# Altium PCB JWB-001_Charger.PcbDoc
Units mil, origin at the board's own origin, x right, y up, seen from the top; angles counter-clockwise.
Board outline 685.53 x 541.65 mil, 2 copper layers (Top, Bottom), stack 30.2 mil thick; 12 components, 10 nets, 53 pads, 38 vias.
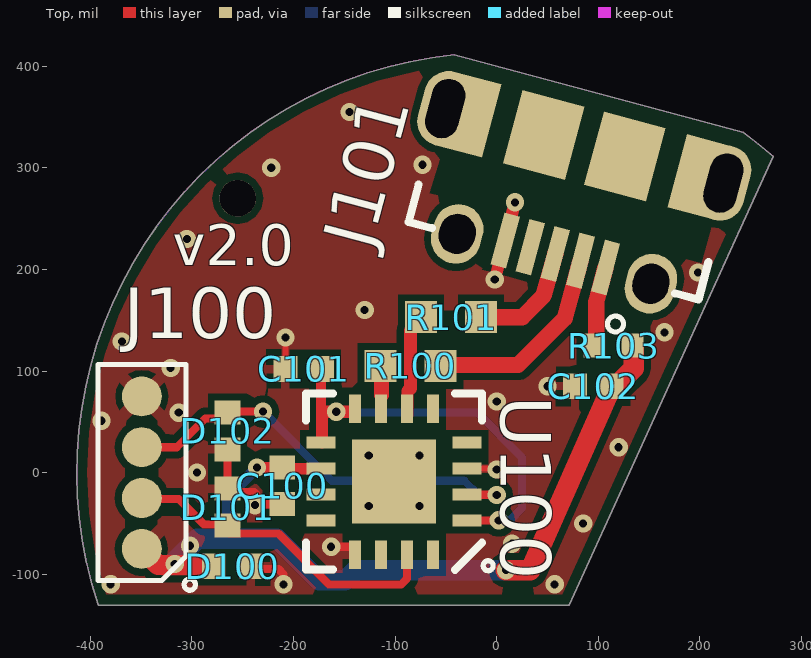
[diagram p0: Top view]
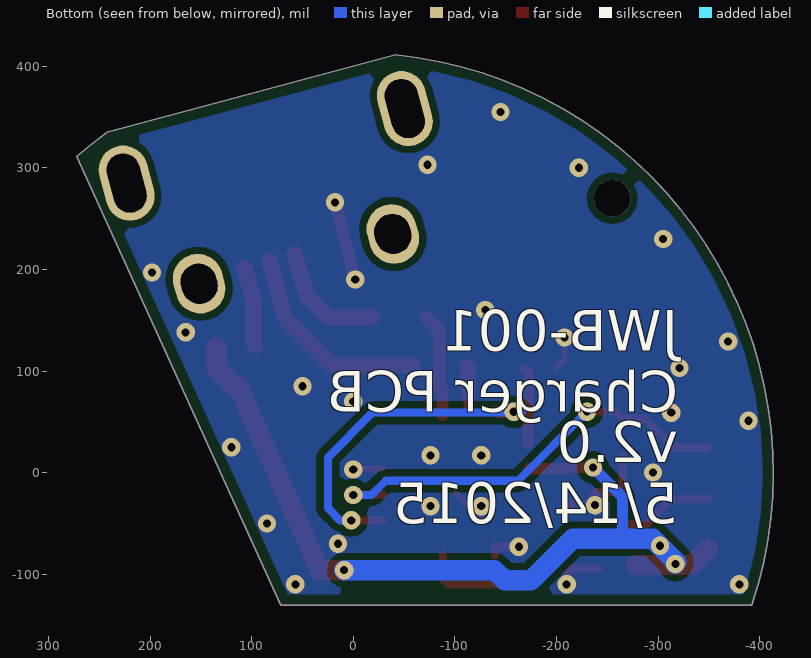
[diagram p1: Bottom view, seen from below]

## Layer stack, top to bottom
Top Solder: solder mask 0.8, Solder Resist, Dk 3.5
Top: signal copper 1.6
Core 1: core 27, Composite dielectric, Dk 4.2
Bottom: signal copper 1.6
Bottom Solder: solder mask 0.8, Solder Resist, Dk 3.5

## Board outline
-392.28,-130.4 71.49,-130.4 272.15,311.17 ccw(c0,0) 242.39,334.87 -41.92,411.25 ccw(c0,0)

## Design rules (kind name [scope] priority, off if disabled: settings)
Clearance Clearance_Poly [InPolygon vs (OnLayer('Keep-Out Layer'))] p1: gap=6 except(0: Arc-Text Track-Text SMDPad-Text THPad-Text Via-Text Fill-Text Poly-Text Region-Text Text-Text; 10: Arc-Poly Arc-Region Track-Poly Track-Region SMDPad-Poly SMDPad-Region THPad-Poly THPad-Region Via-Poly Via-Region Fill-Poly Fill-Region Poly-Poly Poly-Region Region-Region)
Clearance [All] p2: gap=7 except(0: Arc-Text Track-Text SMDPad-Text THPad-Text Via-Text Fill-Text Poly-Text Region-Text Text-Text)
ComponentClearance [All] p1: gap=5 collisioncheckmode=3 verticalgap=10 showdistances=FALSE
Height [All] p1: minheight=0 maxheight=1000 prefheight=100
HoleSize [All] p1: absolutevalues=TRUE maxlimit=100000 minlimit=5 maxpercent=80.000 minpercent=20.000
HoleToHoleClearance [All] p1: gap=6 allowstackedmicrovias=TRUE
MinimumSolderMaskSliver [All] p1: minsoldermaskwidth=1
PlaneClearance [InPoly] p1: clearance=10
PlaneConnect [All] p1 off: planeconnectstyle=Relief reliefexpansion=20 reliefentries=4 reliefconductorwidth=10 reliefairgap=10
PolygonConnect ThermalVias [IsVia] p1: connectstyle=Direct reliefconductorwidth=10 reliefentries=4 polygonreliefangle="90 Angle" airgapwidth=10
PolygonConnect "PolygonConnect - Power" [InComponent('J100')] p2: connectstyle=Relief reliefconductorwidth=12 reliefentries=4 polygonreliefangle="45 Angle" airgapwidth=6
PolygonConnect PolygonConnect-BGA [InComponentClass('')] p3: connectstyle=Relief reliefconductorwidth=6 reliefentries=4 polygonreliefangle="45 Angle" airgapwidth=6
PolygonConnect PolygonConnect-General [All] p4: connectstyle=Relief reliefconductorwidth=8 reliefentries=4 polygonreliefangle="90 Angle" airgapwidth=7
RoutingVias [All] p1: holewidth=8 width=18 viastyle="Through Hole" minholewidth=8 minwidth=18 maxholewidth=8 maxwidth=18
SilkToBoardRegionClearance [All] p1 off:
SilkToSilkClearance [All] p1 off: silktosilkclearance=1
SilkToSolderMaskClearance [IsPad] p1 off: minsilkscreentomaskgap=0 clearancetoexposedcopper=TRUE
SolderMaskExpansion SolderMaskExpansion_via [IsVia] p1: expansion=-10
SolderMaskExpansion [All] p2: expansion=3.5
ViasUnderSMD ViasUnderSMD_Pad [InNet('GND')] p1: allowed=TRUE
ViasUnderSMD [All] p2: allowed=FALSE
Width [All] p1: maxlimit=100 minlimit=6 preferedwidth=6
20 further rules are at their usual default settings.

## Components (designator, comment, footprint, x,y, rotation, side; value= is the part's Value field where it differs from the comment)
C100 "Cap 0402 4.7uF 10V4.7uF" "Cap 0402 HD" -211,-13 r270 top
C101 "Cap 0402 0.1uF 10V0.1uF" "Cap 0402 HD" -190,102 r180 top
C102 "Cap 0402 1.0uF 10V1.0uF" "Cap 0402 HD" 95,85 r180 top
D100 "SESD0402P1BN-0450-0906V" "CAP 0402 HD" -260,-92 r0 top
D101 "SESD0402P1BN-0450-0906V" "CAP 0402 HD" -265,-34 r270 top
D102 "SESD0402P1BN-0450-0906V" "CAP 0402 HD" -265,41 r270 top
J100 "854-22-004-30-001101" HDR.050P-4Pin-SMT-R -349.33,0 r90 top
J101 "USB_Micro_B_W-Tabs" USB_Micro_RA_W-TABS 86.19,321.65 r165 top
R100 "Res 0603 27R 5%27" "RES 0603 HD" -85,105 r180 top
R101 "Res 0603 27R 5%27" "RES 0603 HD" -45,153 r180 top
R103 "Res 0402 0R Jumper0" "RES 0402" 115,125 r0 top
U100 "FT230XQ" QFN0.65P4x4-16Pin_W-Pad -101,-9 r180 top

## Footprints (in the part's own frame and the unit in brackets; to place one, negate y for a bottom-side part, rotate by r counter-clockwise, add the part's x,y. Pads: shape width x height; smd on the part's side, far side on the other; paste and mask are expansions set on the pad)
"Cap 0402 HD" [mm] "Chip Capacitor, 2-Leads, Body 1.00x0.50mm, IPC Medium Density"
  rect 0.6x0.64 smd: 1(-0.46,0) 2(0.46,0)
  body extent -0.55,-0.3 0.55,0.3, height 0.6
"CAP 0402 HD" [mm] "Chip Capacitor, 2-Leads, Body 1.00x0.50mm, IPC Medium Density"
  rect 0.6x0.64 smd: 1(-0.46,0) 2(0.46,0)
  body extent -0.55,-0.3 0.55,0.3, height 0.6
HDR.050P-4Pin-SMT-R [mm] "Header 0.050\" Pitch, 4Pin 1 row, SMT with 1mm Round pads"
  round 1 smd mask+0.08: 1(-1.905,0) 2(-0.635,0) 3(0.635,0) 4(1.905,0)
  silkscreen extent -2.94,-1.34 2.7,1.1, body extent -2.74,-1.11 2.74,1.11, height 6.4
QFN0.65P4x4-16Pin_W-Pad [mm] "QFN, 16-Leads, Body 4x4mm, Pitch 0.65mm, Thermal Pad 2.1x2.1mm, IPC High Density"
  rect 0.72x0.3 smd: 1(-1.825,0.975) 2(-1.825,0.325) 3(-1.825,-0.325) 4(-1.825,-0.975) 9(1.825,-0.975) 10(1.825,-0.325) 11(1.825,0.325) 12(1.825,0.975)
  rect 0.3x0.72 smd: 5(-0.975,-1.825) 6(-0.325,-1.825) 7(0.325,-1.825) 8(0.975,-1.825) 13(0.975,1.825) 14(0.325,1.825) 15(-0.325,1.825) 16(-0.975,1.825)
  rect 2.1x2.1 smd paste-1.05: 17(0,0)
  silkscreen extent -2.48,-2.2 2.2,2.22, body extent -2.05,-2.05 2.05,2.05, height 0.8
"RES 0402" [mm] "Chip Resistor, 2-Leads, Body 1.05x0.54mm, IPC Medium Density"
  rect 0.55x0.6 smd: 1(-0.475,0) 2(0.475,0)
  body extent -0.55,-0.3 0.55,0.3, height 0.4
"RES 0603 HD" [mm] "Chip Resistor, 2-Leads, Body 1.60x0.82mm, IPC High Density"
  rect 0.8x0.8 smd: 1(-0.75,0) 2(0.75,0)
  body extent -0.85,-0.48 0.85,0.48, height 0.55
USB_Micro_RA_W-TABS [mm] "USB Micro-AB Connector, 5-Leads, Pitch 0.65mm, 8mm x 5mm"
  rect 0.4x1.35 smd: 1(-1.3,2.8) 2(-0.65,2.8) 3(0,2.8) 4(0.65,2.8) 5(1.3,2.801)
  oval 1.225x1.9 hole 0.825 slot 1.5 at 90 deg: 6(-3.6,0) 6(3.6,0.001)
  rect 1.2x1.9 smd: 6(-3,0) 6(3,0)
  oval 1.25x1.5 hole 0.9 slot 1 at 90 deg: 6(-2.5,2.9) 6(2.5,2.95)
  rect 1.6x1.9 smd: 6(-1.05,0) 6(1.05,0)
  silkscreen extent -3.75,2 3.75,4.3, body extent -4,-2.62 4,3.43, height 2.83

## Part data
C100: library part "Cap 0402 4.7uF 10V", "Cap, Ceramic 4.7uF 10V 20% X5R 0402"
C101: library part "Cap 0402 0.1uF 10V", "Cap, Ceramic 0.1uF 10V 10% X5R 0402"
C102: library part "Cap 0402 1.0uF 10V", "Cap, Ceramic 1.0uF 10V 10% X5R 0402"
D100 D101 D102: library part SESD0402P1BN-0450-090, "ESD TVS Diode, 16kV air, 0402"
J100: "Spring Loaded Header 0.05\" Pitch, 4Pin, 4x1, 4.98mm - 6.4mm Height"
J101: "USB Micro B Receptacle, Right Angle, SMT with 4 TH Tabs"
R100 R101: library part "Res 0603 27R 5%", "Resistor 27 ohm 5%, 1/10W, 0603"
R103: library part "Res 0402 0R Jumper", "Resistor 0 ohm 1/16W 0402"
U100: "USB to UART converter IC, Single channel with flow control, QFN-16"

## Free pads (board coordinates)
  round 35.98 hole 35.98: 0(-255,270)

## Via types
v1: diameter 18, hole 8, Top to Bottom, 38 vias

## Nets (pads, with @x,y where several pads share a name; then routed paths per layer and width w, separated by ;. In a path a pad name is that pad's centre, name@x,y a point inside that pad or via, vN(x,y) a via of type N, cw(c..) or ccw(c..) an arc to the next point about the centre after c; other vN are vias at no path point)
3V3: C101.1 U100.1 U100.8 U100.9 | length 428.7
  Top w8: U100.1 -28.76,-47 v1(2,-47)
  Top w10: -172,52 -173,53 -173,97.89 C101.1@-168.89,102
  Top w12: U100.9@-172,29.87 -172,52 -172,58.89 ; -170.89,59.89 v1(-158,59.89) U100.8@-141.98,59.89
  Bottom w8: v1@-166.11,59.89 v1(-158,59.89) ; v1@-158,59 -19,59 25,15 25,-35 13,-47 v1(2,-47)
GND: C100.2 C101.2 C102.2 D100.2 D101.1 D102.2 J100.4 J101.5 U100.3 U100.13 U100.17 | length 355.9
  Top w6: v1@-236,-31 v1@-235.89,-31.11 ; v1(-208,133) -208,110.98 C101.2@-200,102.98 ; U100.17@-125,-45 -125,-44.37 U100.17@-100.59,-19.96 ; U100.3@-28.74,4 -1,4 v1(0,3)
  Top w8: D102.2@-265,16.89 D101.1 -265,-21.89 -262.11,-19 -239,-19 -236,-22 v1@-236,-31 ; D100.2@-241.89,-95 -215,-95 -210,-100 v1(-210,-110) ; v1@-235.89,-31.11 C100.2 ; v1(-163,-73) -139.39,-73 U100.13
  Top w12: v1(-2,190) J101.5 v1(18,266)
  other v1: -380,-110 57,-110 15,-70 85,-50 -126,-33 -76,-33 -238,-32 -295,0 -126,17 -76,17 120,25 -389,51 -313,59 0,70 50,85 -321,103 -369,129 165,138 -130,160 198,197 -305,230 -222,300 -73,303 -145,355
NetD101_2: D101.2 J100.2 U100.15 | length 322.1
  Top w8: J100.2 -348.33,-26 -313,-26 -288,-51 -272.11,-51 -263.11,-60 -215,-60 -165,-110 -94,-110 -88.2,-104.2 U100.15
NetD102_1: D102.1 J100.3 U100.2 | length 427
  Top w8: J100.3 -315,25 -286.89,53.11 -265,53.11 -258.11,60 v1(-230,60) ; U100.2 -0.2,-21.8 v1(0,-22)
  Bottom w8: v1(-230,60) -162,-8 -32,-8 -18,-22 v1(0,-22)
NetJ101_1: J101.1 R103.1 | length 78.8
  Top w16: R103.1 98,126.7 98,168 J101.1
NetJ101_2: J101.2 R100.1 | length 208.2
  Top w16: R100.1@-58.43,100.91 -58.43,106 21,106 67,152 J101.2
NetJ101_3: J101.3 R101.1 | length 115.9
  Top w16: R101.1@-18.43,153 R101.1 25,153 46,174 J101.3
NetR100_2: R100.2 U100.7 | length 42.9
  Top w10: U100.7@-113.39,62.85 U100.7@-113.39,76.39
  Top w15: U100.7@-113.39,76.39 -113.39,103.19 R100.2@-111.57,105
NetR101_2: R101.2 U100.6 | length 102.7
  Top w12: U100.6@-87.8,57 -87.8,80.2 -85,83
  Top w13: -85,83 -85,139.57 R101.2@-71.57,153
VUSB: C100.1 C102.1 D100.1 J100.1 R103.2 U100.10 | length 855.8
  Top w11: v1(-236,5) -235.89,5.11 C100.1 -209.69,3.8 U100.10
  Top w20: J100.1 -333.33,-91 D100.1@-278.11,-91 ; v1(9,-96) 33,-96 C102.1 117,85 134.7,102.7 R103.2@134.7,124
  Bottom w11: -265,-65 -265,-24 v1(-236,5)
  Bottom w20: v1(-317,-90) -317,-89 -318,-88 -295,-65 -265,-65 -216,-65 -175,-106 -149,-106 -139,-96 v1(9,-96)
  other v1: -302,-72
pads on no net: J101.4 J101.6 U100.4 U100.5 U100.11 U100.12 U100.14 U100.16
copper on no net: | length 4060
  Top w7.87: 7472.1,143.87 7472.1,238.87 8392.1,238.87 8392.1,143.87 7472.1,143.87
  Bottom w7.87: 7472.1,-211.13 7472.1,-116.13 8392.1,-116.13 8392.1,-211.13 7472.1,-211.13

## Polygon pours and split planes (outlines as drawn)
GND on Top "Top-GND" (solid, remove dead copper, pour order 6): -392.28,-130.4 71.49,-130.4 272.15,311.17 ccw(c0,0) 242.39,334.87 -41.92,411.25 ccw(c0,0)
VUSB on Top "Top-VUSB" (solid, pour order 4): -364,-49 -364,-86 -356,-94 -349,-101 -276,-101 -276,-72 -304,-44 -305,-43 -364,-43 -364,-52
GND on Bottom "Bottom-GND" (solid, remove dead copper, pour order 8): -392.28,-130.4 71.49,-130.4 272.15,311.17 ccw(c0,0) 242.39,334.87 -41.92,411.25 ccw(c0,0)

## Keep-outs
Keep-Out Layer:
  rectangle: 7472.1,-927.13 7662.1,-832.13
  lines w1: -392.28,-130.4 cw(c0,0) -41.92,411.25 242.39,334.87 cw(c0,0) 272.15,311.17 71.49,-130.4 -392.28,-130.4
  lines w7.87: 7472.1,-927.13 7472.1,-832.13 8392.1,-832.13 8392.1,-927.13 7472.1,-927.13
  text "ROUTING KEEPOUT LAYER" at 7732.1,-900.13 h35

## Other copper
Top:
  rectangle: 7472.1,143.87 7662.1,238.87
  pour cut-out: -56,160 -62,154 -62,142 -62,99 17,99 55,137 55,160
  pour cut-out: -27,405 -66.5,275 202,206 237,335
  text ".Layer_Name" at 7732.1,170.87 h40
Bottom:
  rectangle: 7472.1,-211.13 7662.1,-116.13
  text ".Layer_Name" at 7732.1,-184.13 h40
Multi-Layer:
  rectangle: 7462.1,-1047.13 7652.1,-952.13
  lines w7.87: 7462.1,-1047.13 7462.1,-952.13 8382.1,-952.13 8382.1,-1047.13 7462.1,-1047.13
  text "MULTILAYER" at 7722.1,-1020.13 h40

## Silkscreen, mask and mechanical layers (free items; w line width, h text height)
Top Overlay:
  rectangle: 7472.1,379.87 7662.1,474.87
  lines w7.87: 7472.1,379.87 8392.1,379.87 8392.1,474.87 7472.1,474.87 7472.1,379.87
  text ".Layer_Name" at 7732.1,406.87 h31.5
  text "v2.0" at -319,204 h40
Bottom Overlay:
  rectangle: 7472.1,-447.13 7662.1,-352.13
  lines w7.87: 7472.1,-447.13 8392.1,-447.13 8392.1,-352.13 7472.1,-352.13 7472.1,-447.13
  text "JWB-001" at -320,120 h40
  text "Charger PCB" at -320,60 h40
  text "v2.0" at -320,10 h40
  text "5/14/2015" at -320,-50 h40
  text ".Layer_Name" at 7732.1,-420.13 h40
Top Paste:
  rectangle: 7472.1,497.87 7662.1,592.87
  lines w7.87: 7472.1,497.87 7472.1,592.87 8392.1,592.87 8392.1,497.87 7472.1,497.87
  text ".Layer_Name" at 7732.1,524.87 h40
Bottom Paste:
  rectangle: 7472.1,-565.13 7662.1,-470.13
  lines w7.87: 7472.1,-565.13 7472.1,-470.13 8392.1,-470.13 8392.1,-565.13 7472.1,-565.13
  text ".Layer_Name" at 7732.1,-538.13 h40
Top Solder:
  rectangle: 7472.1,261.87 7662.1,356.87
  lines w7.87: 7472.1,261.87 8392.1,261.87 8392.1,356.87 7472.1,356.87 7472.1,261.87
  text ".Layer_Name" at 7732.1,288.87 h40
Bottom Solder:
  rectangle: 7472.1,-329.13 7662.1,-234.13
  lines w7.87: 7472.1,-329.13 7472.1,-234.13 8392.1,-234.13 8392.1,-329.13 7472.1,-329.13
  text ".Layer_Name" at 7732.1,-302.13 h40
Drill Guide:
  rectangle: 7472.1,-683.13 7662.1,-588.13
  lines w7.87: 7472.1,-683.13 8392.1,-683.13 8392.1,-588.13 7472.1,-588.13 7472.1,-683.13
  text ".Layer_Name" at 7732.1,-656.13 h40
Board Outline:
  rectangle: 7472.1,1560.39 7662.1,1655.39
  lines w1: -392.28,-130.4 cw(c0,0) -41.92,411.25 242.39,334.87 cw(c0,0) 272.15,311.17 71.49,-130.4 -392.28,-130.4
  lines w7.87: 7472.1,1560.39 8392.1,1560.39 8392.1,1655.39 7472.1,1655.39 7472.1,1560.39
  text ".Layer_Name" at 7732.1,1587.39 h40
Border & Title:
  drawing of 1359 lines, arcs and shapes, not listed
  text "1" at -798.51,6212.76 h70
  text "2" at 1952.16,6212.76 h70
  text "3" at 4697.16,6212.76 h70
  text "4" at 7448.17,6212.76 h70
  text "REVISION" at 6700.39,5980.39 h80
  text "REV" at 5290.39,5810.39 h60
  text "DESCRIPTION" at 5720.39,5810.39 h60
  text "DATE" at 7680.39,5810.39 h60
  text "BY" at 8310.39,5810.39 h60
  text ".ReleaseRev1" at 5290.39,5660.39 h50
  text ".ReleaseDesc1" at 5720.39,5660.39 h50
  text ".ReleaseBy1" at 8260.39,5660.39 h50
  text ".ReleaseDate1" at 7600.39,5650.39 h50
  text ".ReleaseRev2" at 5290.39,5510.39 h50
  text ".ReleaseDesc2" at 5720.39,5510.39 h50
  text ".ReleaseDate2" at 7600.39,5510.39 h50
  text ".ReleaseBy2" at 8260.39,5510.39 h50
  text ".ReleaseRev3" at 5290.39,5360.39 h50
  text ".ReleaseDesc3" at 5720.39,5360.39 h50
  text ".ReleaseDate3" at 7600.39,5360.39 h50
  text ".ReleaseBy3" at 8260.39,5360.39 h50
  text "A" at -2074.84,5194.76 h70
  text "A" at 8725.16,5194.76 h70
  text "B" at -2074.84,3069.76 h70
  text "B" at 8725.16,3069.76 h70
  text "LAYER USAGE" at 7522.1,1710.87 h80
  text "C" at -2074.84,944.76 h70
  text "C" at 8725.16,944.76 h70
  text "D" at -2074.84,-1175.24 h70
  text "D" at 8725.16,-1175.24 h70
  text "PROJECT:" at 5678.16,-1303.24 h50
  text "ENGINEER:" at 4162.16,-1304.24 h50
  text ".ProjectEngineer" at 4620.39,-1369.61 h70
  text ".GlobalProjectName" at 6110.39,-1369.61 h80
  text "PCB NAME:" at 5673.16,-1517.24 h50
  text "DATE:" at 4165.16,-1521.24 h50
  text "REV:" at 7772.16,-1530.24 h50
  text ".GlobalProjectRevision" at 8057.56,-1604.84 h80
  text ".GLobalReleaseDate" at 4450.39,-1609.61 h70
  text ".PCBName" at 6110.39,-1609.61 h80
  text "For" at 3220.39,-1669.61 h70
  text "DWG NO:" at 4170.39,-1769.61 h50
  text "FILE NAME:" at 5670.39,-1769.61 h50
  text "SCALE:" at 7767.16,-1777.24 h50
  text ".GlobalClientName" at 3010.39,-1839.61 h80
  text ".Pcb_File_Name_No_Path" at 5760.39,-1879.61 h60
  text "1:1" at 8110.16,-1884.24 h50
  text ".PCBDocNum" at 4430.39,-1889.61 h60
  text "1" at -798.51,-2087.24 h70
  text "2" at 1952.16,-2087.24 h70
  text "3" at 4697.16,-2087.24 h70
  text "4" at 7448.17,-2087.24 h70
Fabrication Notes:
  drawing of 198 lines, arcs and shapes, not listed
  text "Fabrication Notes:" at -1739.8,5947.76 h70
  text "1. Fabricate to meet or exceed IPC 6011/6012 Class 2, as definied in IPC-2221" at -1792.4,5795.16 h50
  text "2. Prepreg Material: 370HR or material with TG >= 170, TD >= 340" at -1799.61,5675.39 h50
  text "3. Minimum trace width is 7mil, minimum spacing is 7mil" at -1799.61,5550.39 h50
  text "4. Board finish: Electroless Nickel, Immersion Gold (ENIG)" at -1799.61,5425.39 h50
  text "5. Flammability: Materials to meet UL94V-0 specification" at -1799.61,5325.39 h50
  text "6. Apply LPI Soldermask (Green) on both sides" at -1799.61,5200.39 h50
  text "7. Silkscreen on both sides using white epoxy ink, registration to be 10mil," at -1799.61,5075.39 h50
  text "clear silkscreen from all exposed pads" at -1649.61,4950.39 h50
  text "8. Dimensions and hole sizes are in mils" at -1799.61,4825.39 h50
  text "9. The fabricated board shall be RoHS compliant" at -1799.61,4700.39 h50
  text "2 Layer PCB 32mil +/- 10% Finished Thickness" at 3150.39,4650.39 h60
  text "All layer thickness and dielectric values are +/- 10% tolerance" at 3150.39,4550.39 h60
  text "Layer" at 3199.5,4390.5 h60
  text "Name" at 3609.41,4390.5 h60
  text "Material" at 4539.16,4390.5 h60
  text "Thickness" at 5798.79,4390.5 h60
  text "Constant" at 6448.63,4390.5 h60
  text "Board Layer Stack" at 7018.49,4390.5 h60
  text "1" at 3199.5,4270.5 h60
  text "Top Overlay" at 3609.41,4270.5 h60
  text "2" at 3199.5,4150.5 h60
  text "Top Solder" at 3609.41,4150.5 h60
  text "Solder Resist" at 4539.16,4150.5 h60
  text "0.80mil" at 5798.79,4150.5 h60
  text "3.5" at 6448.63,4150.5 h60
  text "3" at 3199.5,4030.5 h60
  text "Top" at 3609.41,4030.5 h60
  text "Copper" at 4539.16,4030.5 h60
  text "1.60mil" at 5798.79,4030.5 h60
  text "4" at 3199.5,3910.5 h60
  text "Core 1" at 3609.41,3910.5 h60
  text "Composite dielectric" at 4539.16,3910.5 h60
  text "27.00mil" at 5798.79,3910.5 h60
  text "4.2" at 6448.63,3910.5 h60
  text "5" at 3199.5,3790.5 h60
  text "Bottom" at 3609.41,3790.5 h60
  text "Copper" at 4539.16,3790.5 h60
  text "1.60mil" at 5798.79,3790.5 h60
  text "6" at 3199.5,3670.5 h60
  text "Bottom Solder" at 3609.41,3670.5 h60
  text "Solder Resist" at 4539.16,3670.5 h60
  text "0.80mil" at 5798.79,3670.5 h60
  text "3.5" at 6448.63,3670.5 h60
  text "7" at 3199.5,3550.5 h60
  text "Bottom Overlay" at 3609.41,3550.5 h60
  text ".Layer_Name" at 7732.1,1473.87 h40
Ref Des Top:
  rectangle: 7472.1,1210.87 7662.1,1305.87
  lines w7.87: 7472.1,1210.87 7472.1,1305.87 8392.1,1305.87 8392.1,1210.87 7472.1,1210.87
  text ".Layer_Name" at 7732.1,1237.87 h40
  text "$Id: CDI_001_rigid_flex_v1.5.brd 3140 2014-06-26 15:58:28Z davisj $" at -7412.32,-2884.35 h117.8
Ref Des Bottom:
  rectangle: 7472.1,1090.87 7662.1,1185.87
  lines w7.87: 7472.1,1090.87 7472.1,1185.87 8392.1,1185.87 8392.1,1090.87 7472.1,1090.87
  text ".Layer_Name" at 7732.1,1117.87 h40
Assembly Top:
  rectangle: 7472.1,974.87 7662.1,1069.87
  lines w7.87: 7472.1,974.87 8392.1,974.87 8392.1,1069.87 7472.1,1069.87 7472.1,974.87
  text ".Layer_Name" at 7732.1,1001.87 h40
Assembly Bottom:
  rectangle: 7472.1,856.87 7662.1,951.87
  lines w7.87: 7472.1,856.87 8392.1,856.87 8392.1,951.87 7472.1,951.87 7472.1,856.87
  text ".Layer_Name" at 7732.1,883.87 h40
Courtyard Top:
  rectangle: 7472.1,736.87 7662.1,831.87
  lines w7.87: 7472.1,736.87 8392.1,736.87 8392.1,831.87 7472.1,831.87 7472.1,736.87
  text ".Layer_Name" at 7732.1,763.87 h40
Coutryard Bottom:
  rectangle: 7472.1,616.87 7662.1,711.87
  lines w7.87: 7472.1,616.87 8392.1,616.87 8392.1,711.87 7472.1,711.87 7472.1,616.87
  text ".Layer_Name" at 7732.1,643.87 h40
Drill Drawing:
  circle w1: c2178.32,2796.26 r21.82
  rectangle: 7472.1,-801.13 7662.1,-706.13
  lines w1: 2156.5,2381.77 2156.5,2392.67 2167.41,2403.58 2156.5,2414.49 2156.5,2425.4 2167.41,2425.4 2178.32,2414.49 2189.23,2425.4 2200.13,2425.4 2200.13,2414.49 2189.23,2403.58 2200.13,2392.67 2200.13,2381.77 2189.23,2381.77 2178.32,2392.67 2167.41,2381.77 2156.5,2381.77 ; 2156.5,2523.57 2167.41,2523.57 2167.41,2512.66 2189.23,2512.66 2189.23,2523.57 2200.13,2523.57 2200.13,2545.38 2189.23,2545.38 2189.23,2556.29 2167.41,2556.29 2167.41,2545.38 2156.5,2545.38 2156.5,2523.57 ; 2156.5,2643.55 2178.32,2654.46 2200.13,2643.55 2189.23,2665.37 2200.13,2687.18 2178.32,2676.28 2156.5,2687.18 2167.41,2665.37 2156.5,2643.55
  lines w7.87: 7472.1,-801.13 7472.1,-706.13 8392.1,-706.13 8392.1,-801.13 7472.1,-801.13
  lines w15: 2096.66,2342.5 8377.29,2342.5 ; 2096.66,2866.07 8377.29,2866.07 ; 2581.44,2211.6 2581.44,2996.97 ; 3194.45,2211.6 3194.45,2996.97 ; 4372.73,2211.6 4372.73,2996.97 ; 4818.25,2211.6 4818.25,2996.97 ; 5462.66,2211.6 5462.66,2996.97 ; 6274.56,2211.6 6274.56,2996.97 ; 7337.69,2211.6 7337.69,2996.97 ; 2096.66,2211.6 8377.29,2211.6 8377.29,2996.97 2096.66,2996.97 2096.66,2211.6
  text "Symbol" at 2175.19,2905.34 h62.83
  text "Hit Count" at 2620.71,2905.34 h62.83
  text "Finished Hole Size" at 3233.72,2905.34 h62.83
  text "Plated" at 4412,2905.34 h62.83
  text "Hole Type" at 4857.52,2905.34 h62.83
  text "Drill Layers" at 5501.93,2905.34 h62.83
  text "Rout Path Length" at 6313.83,2905.34 h62.83
  text "Physical Length" at 7376.96,2905.34 h62.83
  text "38" at 2620.71,2774.45 h52.36
  text "8.00mil (0.203mm)" at 3233.72,2774.45 h52.36
  text "PTH" at 4412,2774.45 h52.36
  text "Round" at 4857.52,2774.45 h52.36
  text "Layer 1- 4" at 5501.93,2774.45 h52.36
  text "2" at 2620.71,2643.55 h52.36
  text "32.48mil (0.825mm)" at 3233.72,2643.55 h52.36
  text "PTH" at 4412,2643.55 h52.36
  text "Slot" at 4857.52,2643.55 h52.36
  text "26.57mil (0.675mm)" at 6313.83,2643.55 h52.36
  text "59.06mil (1.500mm)" at 7376.96,2643.55 h52.36
  text "2" at 2620.71,2512.66 h52.36
  text "35.43mil (0.900mm)" at 3233.72,2512.66 h52.36
  text "PTH" at 4412,2512.66 h52.36
  text "Slot" at 4857.52,2512.66 h52.36
  text "3.94mil (0.100mm)" at 6313.83,2512.66 h52.36
  text "39.37mil (1.000mm)" at 7376.96,2512.66 h52.36
  text "1" at 2620.71,2381.77 h52.36
  text "35.98mil (0.914mm)" at 3233.72,2381.77 h52.36
  text "PTH" at 4412,2381.77 h52.36
  text "Round" at 4857.52,2381.77 h52.36
  text "43 Total" at 2620.71,2250.87 h52.36
  text "Slot definitions :" at 2175.19,2121.82 h52.36
  text "Rout Path Length" at 3079.91,2121.82 h52.36
  text "= Calculated from tool start centre position to tool end centre position." at 3941.01,2121.82 h52.36
  text "Physical Length" at 3079.91,2032.03 h52.36
  text "= Rout Path Length + Tool Size = Slot length as defined in the PCB layout" at 3888.67,2032.03 h52.36
  text ".Layer_Name" at 7732.1,-774.13 h40

## Dimensions
71.49,-130.4 to 272.15,311.17 on Fabrication Notes
71.49,-130.4 to -392.28,-130.4 on Fabrication Notes
0,0 to -420,360 on Fabrication Notes